# EAGLE board HIRIMINI-CHINA (EAGLE 9.6.2)
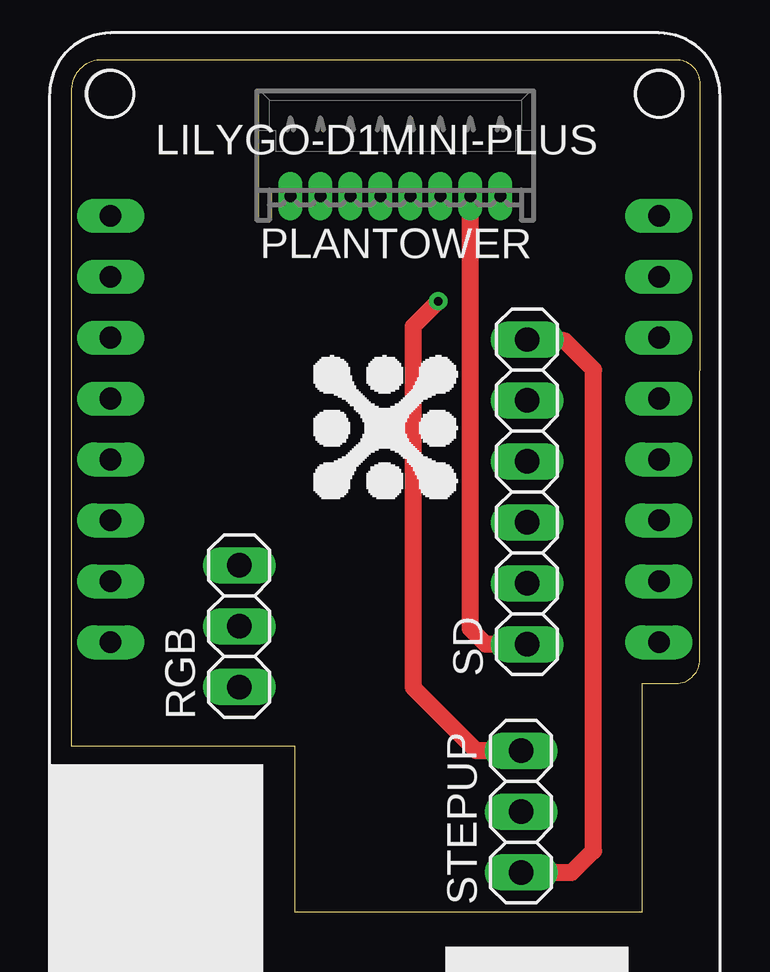
[diagram p0: board, top side]
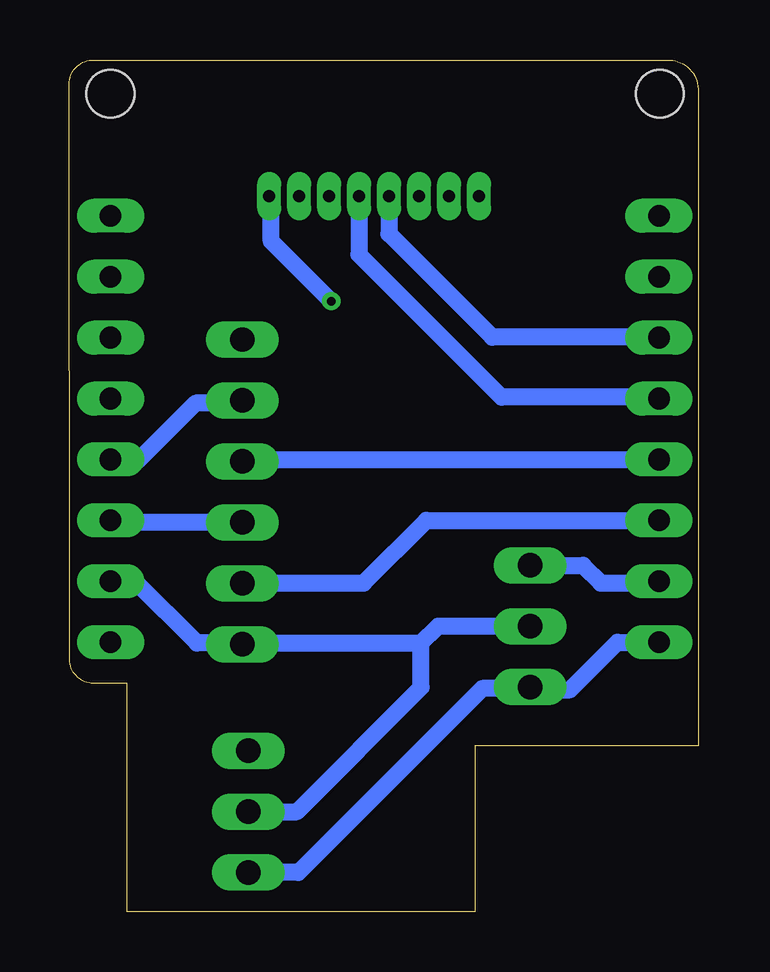
[diagram p1: board, bottom side, seen from below]

Size 26.22 x 35.5 mm. Coordinates in mm from the lower left corner, seen from the top.
Outline: 0,6.92 9.3,6.92 9.3,0 23.8,0 23.8,9.52 25.22,9.52 arc90 26.2,10.5 26.22,34.6 arc90 25.12,35.5 1.3,35.5 arc90 0,34.3 0,6.92
Copper layers (1*16): Top 0.035mm / dielectric 1.5mm / Bottom 0.035mm
Design rules "default *": minimum track width 0.7mm, minimum drill 0.35mm, track to track 0.3mm, track to pad 0.3mm, pad to pad 0.4mm, via to via 0.4mm, smd to smd 6mil, copper to edge 0.2mm, drill to drill 0.4mm, minimum pad ring 10mil, minimum via ring 8mil, stop-mask expansion 4mil, vias tented up to drill 0mil, thermal gap 10mil
Holes 2 mm at 1.6,34.1 24.5,34.1

## Footprints (pad centres in the part's own frame; a part is rotated, then mirrored left to right if it is on the bottom)
MOLEX_53048-0810 = drill 0.5 pad 0.762 long: 1 4.375,0.02; 2 3.125,0.02; 3 1.875,0.02; 4 0.625,0.02; 5 -0.625,0.02; 6 -1.875,0.02; 7 -3.125,0.02; 8 -4.375,0.02
1X03 = drill 1.016 long: 1 -2.54,0; 2 0,0; 3 2.54,0
1X06 = drill 1.016 long: 1 -6.35,0; 2 -3.81,0; 3 -1.27,0; 4 1.27,0; 5 3.81,0; 6 6.35,0
LILYGO-PADS = drill 0.9 pad 1.143 long: 2 -11.43,6.35; 3V3 -11.43,-8.89; 4 -11.43,3.81; 5 -11.43,1.27; 5V 11.43,-8.89; 6 -11.43,-1.27; 7 -11.43,-3.81; 8 11.43,-3.81; 9 11.43,-1.27; 10 -11.43,-6.35; GND 11.43,-6.35; RST -11.43,8.89; RXD 11.43,6.35; SCL 11.43,1.27; SDA 11.43,3.81; TXD 11.43,8.89

## Placement (x,y rotation side)
PLANTOWER  53048-0810  [MOLEX_53048-0810]  13.51,29.81 0 top
RGB  [1X03]  7,11.9 90 top
SD  [1X06]  19,17.5 90 top
STEPUP  [1X03]  18.75,4.17 90 top
U$2  LILYGOPLUSMINI  [LILYGO-PADS]  13.07,20.12 0 top

## Library data of the parts
PLANTOWER = ConectorPlantower; AVAILABILITY: In Stock; CHECK_PRICES: https://www.snapeda.com/parts/53048-0810/Molex/view-part/?ref=eda; DESCRIPTION: 8 way through board PCB 90deg header | Molex Incorporated 53048-0810; MF: Molex; MP: 53048-0810; PACKAGE: None; PRICE: None; PURCHASE-URL: https://www.snapeda.com/api/url_track_click_mouser/?unipart_id=53851&manufacturer=Molex&part_name=53048-0810&search_term=picoblade 1.25mm header rightangle 8way; SNAPEDA_LINK: https://www.snapeda.com/parts/53048-0810/Molex/view-part/?ref=snap
RGB SD STEPUP = pinhead
U$2 = LILYGOMINI

## Nets
3V3: RGB.1 SD.6 STEPUP.1 U$2.3V3
5V: PLANTOWER.1 STEPUP.3
CLK: SD.3 U$2.8
CS: SD.5 U$2.9
GND: PLANTOWER.2 RGB.2 SD.1 STEPUP.2 U$2.GND
MISO: SD.2 U$2.7
MOSI: SD.4 U$2.6
N$3: PLANTOWER.3
N$12: U$2.RST
N$19: PLANTOWER.6
N$20: PLANTOWER.7
N$21: PLANTOWER.8
RGB: RGB.3 U$2.10
RX-PM: PLANTOWER.4 U$2.5
TX-PM: PLANTOWER.5 U$2.4

## Tracks (layer width: path | path; a pad name or v marks a point on that pad's centre or on a via)
3V3
  Top 0.7: SD.6 19.05,23.8 20.57,23.8 21.77,22.6 21.77,2.54 20.87,1.63 STEPUP.1
  Bottom 0.7: U$2.3V3 3.37,11.23 5.35,9.25 6.89,9.25 RGB.1 7.06,9.3 9,9.3 16.67,1.63 STEPUP.1
5V  (via drill 0.35)
  Top 0.7: v15.3,25.45 14.25,24.4 14.25,9.35 16.89,6.71 STEPUP.3
  Bottom 0.7: PLANTOWER.1 17.8,29.75 17.8,27.95 v15.3,25.45
CLK
  Bottom 0.7: U$2.8 24.44,16.25 19,16.25 SD.3
CS
  Bottom 0.7: SD.5 19.11,21.2 20.95,21.2 23.3,18.85 U$2.9
GND
  Top 0.7: SD.1 17.28,11.15 16.63,11.8 PLANTOWER.2
  Bottom 0.7: 11.55,11.2 10.85,11.9 RGB.2 | 11.55,11.2 18.8,11.2 SD.1 19.05,11.2 20.9,11.2 23.47,13.77 U$2.GND | 11.55,11.2 11.55,9.35 16.73,4.17 STEPUP.2
MISO
  Bottom 0.7: SD.2 13.95,13.7 11.34,16.31 U$2.7
MOSI
  Bottom 0.7: SD.4 18.92,18.85 U$2.6
RGB
  Bottom 0.7: RGB.3 4.8,14.44 4.06,13.7 1.71,13.7 U$2.10
RX-PM
  Bottom 0.7: U$2.5 1.7,21.45 8.2,21.45 14.15,27.39 14.15,29.81 PLANTOWER.4
TX-PM
  Bottom 0.7: U$2.4 1.66,23.95 8.59,23.95 12.9,28.26 12.9,29.81 PLANTOWER.5